# EAGLE board nosilkboth (EAGLE 4.11), part 1 of 3
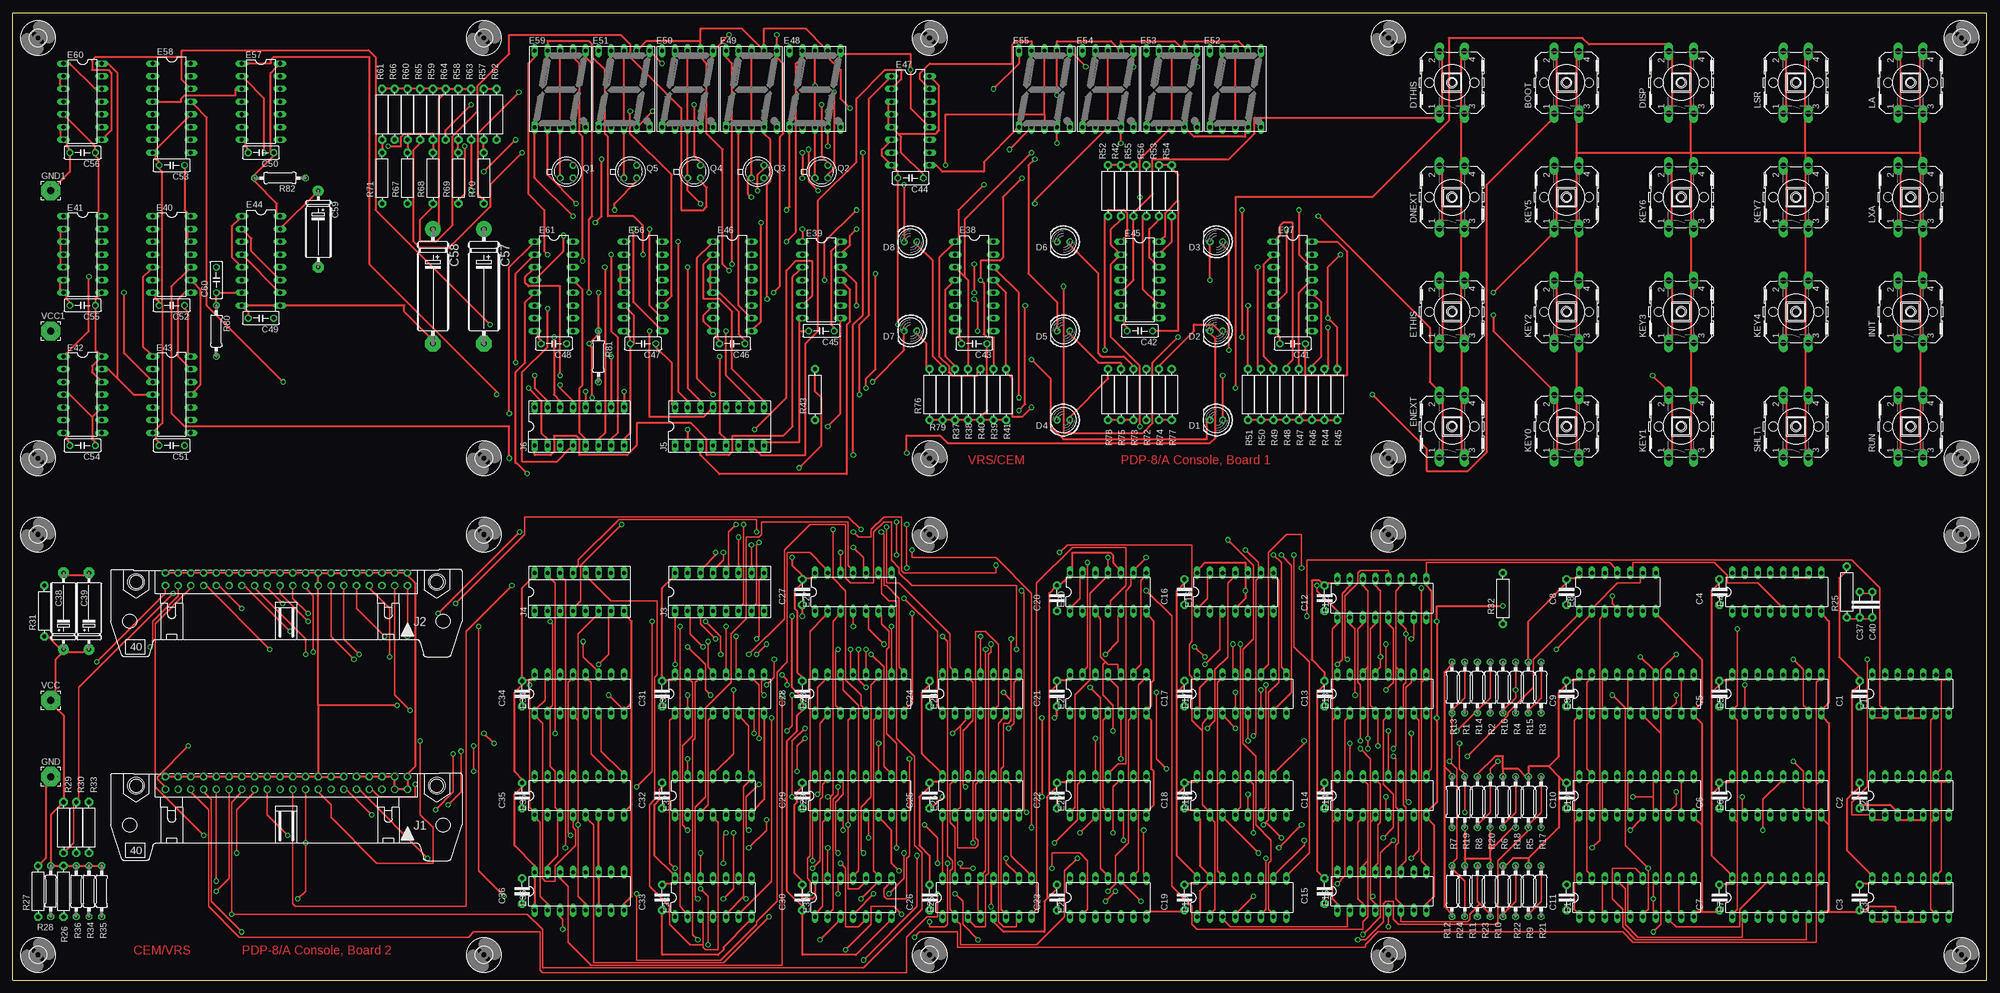
[diagram p0: board, top side]
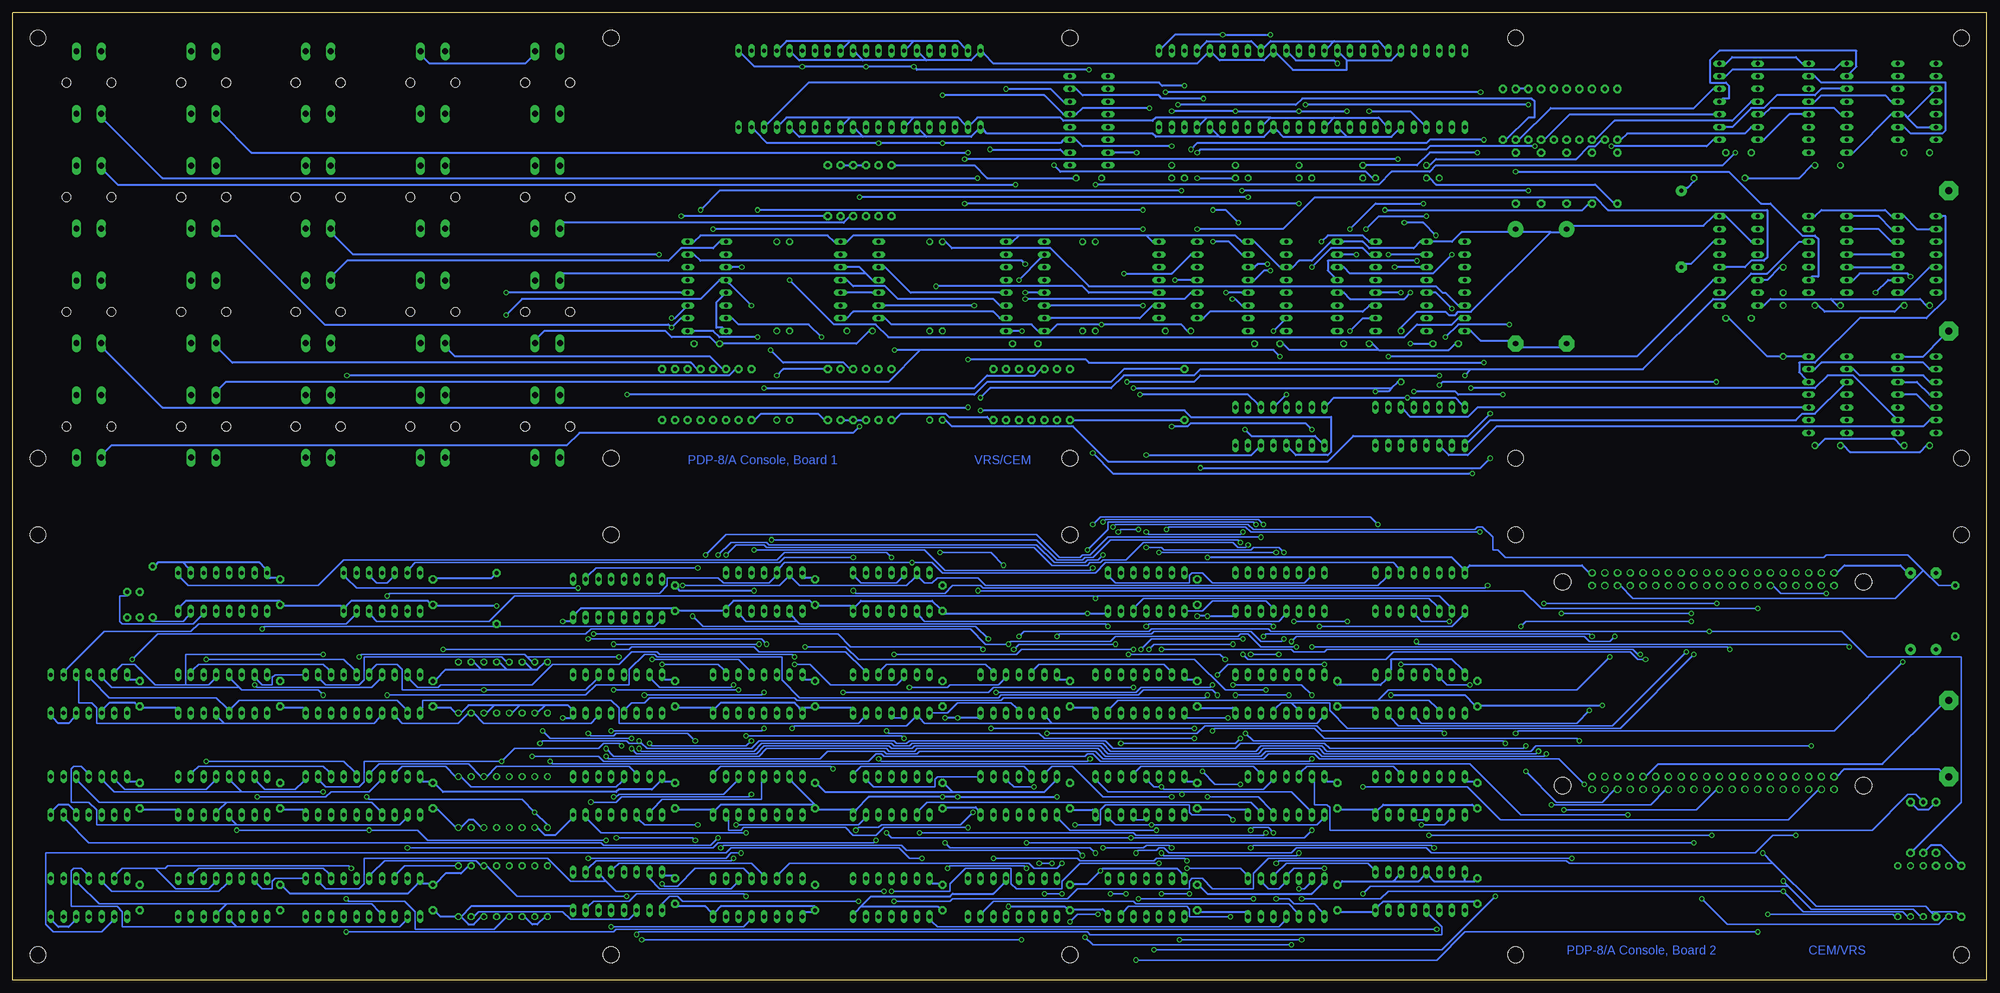
[diagram p1: board, bottom side, seen from below]

Size 393.7 x 193.04 mm. Coordinates in mm from the lower left corner, seen from the top.
Outline: 0,0 0,93.98 0,0
Outline: 0,0 393.7,0 393.7,193.04 0,193.04 0,0
Copper layers (1*16): Top 0.035mm / dielectric 1.5mm / Bottom 0.035mm
Design rules "olimex8mil": minimum track width 10mil, minimum drill 24mil, track to track 8mil, track to pad 8mil, pad to pad 8mil, via to via 8mil, smd to smd 8mil, copper to edge 40mil, drill to drill 10mil, minimum pad ring 10mil, minimum via ring 8mil, stop-mask expansion 0mil, vias tented up to drill 0mil, thermal gap 10mil
Net classes: 1 Supply: width 0.381 mm

## Footprints (pad centres in the part's own frame; a part is rotated, then mirrored left to right if it is on the bottom)
B3F-40XX = drill 1.194 long: 1 -6.248,2.489; 2 6.248,2.489; 3 -6.248,-2.489; 4 6.248,-2.489 | hole 1.803: 0,-4.496; 0,4.496
C-5 = drill 0.813 pad 1.6 octagon: 1 -2.54,0; 2 2.54,0
E15-5 = drill 0.813 pad 2.159 round: + -7.62,0 | drill 0.813 pad 2.159 octagon: - 7.62,0
C050-025X075 = drill 0.813 octagon: 1 -2.54,0; 2 2.54,0
E22-6 = drill 1.016 pad 3.15 round: + -11.43,0 | drill 1.016 pad 3.15 octagon: - 11.43,0
LED5MM = drill 0.813 octagon: A -1.27,0; K 1.27,0
DIL14 = drill 0.813 long: 1 -7.62,-3.81; 2 -5.08,-3.81; 3 -2.54,-3.81; 4 0,-3.81; 5 2.54,-3.81; 6 5.08,-3.81; 7 7.62,-3.81; 8 7.62,3.81; 9 5.08,3.81; 10 2.54,3.81; 11 0,3.81; 12 -2.54,3.81; 13 -5.08,3.81; 14 -7.62,3.81
DIL16 = drill 0.813 long: 1 -8.89,-3.81; 2 -6.35,-3.81; 3 -3.81,-3.81; 4 -1.27,-3.81; 5 1.27,-3.81; 6 3.81,-3.81; 7 6.35,-3.81; 8 8.89,-3.81; 9 8.89,3.81; 10 6.35,3.81; 11 3.81,3.81; 12 1.27,3.81; 13 -1.27,3.81; 14 -3.81,3.81; 15 -6.35,3.81; 16 -8.89,3.81
DIL20 = drill 0.813 long: 1 -11.43,-3.81; 2 -8.89,-3.81; 3 -6.35,-3.81; 4 -3.81,-3.81; 5 -1.27,-3.81; 6 1.27,-3.81; 7 3.81,-3.81; 8 6.35,-3.81; 9 8.89,-3.81; 10 11.43,-3.81; 11 11.43,3.81; 12 8.89,3.81; 13 6.35,3.81; 14 3.81,3.81; 15 1.27,3.81; 16 -1.27,3.81; 17 -3.81,3.81; 18 -6.35,3.81; 19 -8.89,3.81; 20 -11.43,3.81
HDSP-M = drill 0.813 long: 1 -5.08,-7.62; 2 -2.54,-7.62; 3 0,-7.62; 4 2.54,-7.62; 5 5.08,-7.62; 6 5.08,7.62; 7 2.54,7.62; 8 0,7.62; 9 -2.54,7.62; 10 -5.08,7.62
3,81/1,4 = drill 1.397 pad 3.81 octagon: 1 0,0
40H = drill 0.914 round: 1 -24.13,-1.27 | drill 0.914 octagon: 2 -24.13,1.27; 3 -21.59,-1.27; 4 -21.59,1.27; 5 -19.05,-1.27; 6 -19.05,1.27; 7 -16.51,-1.27; 8 -16.51,1.27; 9 -13.97,-1.27; 10 -13.97,1.27; 11 -11.43,-1.27; 12 -11.43,1.27; 13 -8.89,-1.27; 14 -8.89,1.27; 15 -6.35,-1.27; 16 -6.35,1.27; 17 -3.81,-1.27; 18 -3.81,1.27; 19 -1.27,-1.27; 20 -1.27,1.27; 21 1.27,-1.27; 22 1.27,1.27; 23 3.81,-1.27; 24 3.81,1.27; 25 6.35,-1.27; 26 6.35,1.27; 27 8.89,-1.27; 28 8.89,1.27; 29 11.43,-1.27; 30 11.43,1.27; 31 13.97,-1.27; 32 13.97,1.27; 33 16.51,-1.27; 34 16.51,1.27; 35 19.05,-1.27; 36 19.05,1.27; 37 21.59,-1.27; 38 21.59,1.27; 39 24.13,-1.27; 40 24.13,1.27 | hole 3.302: -29.972,0.533; 29.972,0.533
SOCKED-16 = drill 0.813 long: 1 -8.89,-3.81; 2 -6.35,-3.81; 3 -3.81,-3.81; 4 -1.27,-3.81; 5 1.27,-3.81; 6 3.81,-3.81; 7 6.35,-3.81; 8 8.89,-3.81; 9 8.89,3.81; 10 6.35,3.81; 11 3.81,3.81; 12 1.27,3.81; 13 -1.27,3.81; 14 -3.81,3.81; 15 -6.35,3.81; 16 -8.89,3.81
TO18 = drill 0.813 octagon: 1 -1.27,-1.27; 2 1.27,-1.27; 3 1.27,1.27
0207/10 = drill 0.813 octagon: 1 -5.08,0; 2 5.08,0
R-10 = drill 0.813 pad 1.6 octagon: 1 -5.08,0; 2 5.08,0
3,2 = hole 3.2: 0,0

## Placement (x,y rotation side)
BOOT  [B3F-40XX]  309.88,179.07 90 top
C1  [C-5]  368.3,57.15 90 top
C2  [C-5]  368.3,36.83 90 top
C3  [C-5]  368.3,16.51 90 top
C4  [C-5]  340.36,77.47 90 top
C5  [C-5]  340.36,57.15 90 top
C6  [C-5]  340.36,36.83 90 top
C7  [C-5]  340.36,16.51 90 top
C8  [C-5]  309.88,77.47 90 top
C9  [C-5]  309.88,57.15 90 top
C10  [C-5]  309.88,36.83 90 top
C11  [C-5]  309.88,16.51 90 top
C12  [C-5]  261.62,76.2 90 top
C13  [C-5]  261.62,57.15 90 top
C14  [C-5]  261.62,36.83 90 top
C15  [C-5]  261.62,17.78 90 top
C16  [C-5]  233.68,77.47 90 top
C17  [C-5]  233.68,57.15 90 top
C18  [C-5]  233.68,36.83 90 top
C19  [C-5]  233.68,16.51 90 top
C20  [C-5]  208.28,76.2 90 top
C21  [C-5]  208.28,57.15 90 top
C22  [C-5]  208.28,36.83 90 top
C23  [C-5]  208.28,16.51 90 top
C24  [C-5]  182.88,57.15 90 top
C25  [C-5]  182.88,36.83 90 top
C26  [C-5]  182.88,16.51 90 top
C27  [C-5]  157.48,77.47 90 top
C28  [C-5]  157.48,57.15 90 top
C29  [C-5]  157.48,36.83 90 top
C30  [C-5]  157.48,16.51 90 top
C31  [C-5]  129.54,57.15 90 top
C32  [C-5]  129.54,36.83 90 top
C33  [C-5]  129.54,16.51 90 top
C34  [C-5]  101.6,57.15 90 top
C35  [C-5]  101.6,36.83 90 top
C36  [C-5]  101.6,17.78 90 top
C37  10  [C-5]  368.3,74.93 270 top
C38  6.8uf  [E15-5]  10.16,73.66 90 top
C39  6.8uf  [E15-5]  15.24,73.66 90 top
C40  47  [C-5]  370.84,74.93 270 top
C41  0.01  [C050-025X075]  255.27,127 180 top
C42  0.01  [C050-025X075]  224.79,129.54 180 top
C43  0.01  [C050-025X075]  191.77,127 180 top
C44  0.01  [C050-025X075]  179.07,160.02 180 top
C45  0.01  [C050-025X075]  161.29,129.54 180 top
C46  0.01  [C050-025X075]  143.51,127 180 top
C47  0.01  [C050-025X075]  125.73,127 180 top
C48  0.01  [C050-025X075]  107.95,127 180 top
C49  0.01  [C050-025X075]  49.53,132.08 180 top
C50  0.01  [C050-025X075]  49.53,165.1 180 top
C51  0.01  [C050-025X075]  31.75,106.68 180 top
C52  0.01  [C050-025X075]  31.75,134.62 180 top
C53  0.01  [C050-025X075]  31.75,162.56 180 top
C54  0.01  [C050-025X075]  13.97,106.68 180 top
C55  0.01  [C050-025X075]  13.97,134.62 180 top
C56  0.01  [C050-025X075]  13.97,165.1 180 top
C57  6.8uf  [E22-6]  93.98,138.43 270 top
C58  6.8uf  [E22-6]  83.82,138.43 270 top
C59  1.0uf  [E15-5]  60.96,149.86 270 top
C60  82pf  [C050-025X075]  40.64,139.7 90 top
D1  MQ  [LED5MM]  240.03,111.76 180 top
D2  SR  [LED5MM]  240.03,129.54 180 top
D3  MD  [LED5MM]  240.03,147.32 180 top
D4  AC  [LED5MM]  209.55,111.76 180 top
D5  STATUS  [LED5MM]  209.55,129.54 180 top
D6  STATE  [LED5MM]  209.55,147.32 180 top
D7  BUS  [LED5MM]  179.07,129.54 180 top
D8  RUN  [LED5MM]  179.07,147.32 180 top
DISP  [B3F-40XX]  332.74,179.07 90 top
DNEXT  [B3F-40XX]  287.02,156.21 90 top
DTHIS  [B3F-40XX]  287.02,179.07 90 top
E1  74LS95N  [DIL14]  378.46,57.15 0 top
E2  74LS95N  [DIL14]  378.46,36.83 0 top
E3  74LS95N  [DIL14]  378.46,16.51 0 top
E4  74LS123N  [DIL16]  351.79,77.47 0 top
E5  74LS175N  [DIL16]  351.79,57.15 0 top
E6  74LS175N  [DIL16]  351.79,36.83 0 top
E7  74LS175N  [DIL16]  351.79,16.51 0 top
E8  74LS00N  [DIL14]  320.04,77.47 0 top
E9  74S244N  [DIL20]  323.85,57.15 0 top
E10  74S244N  [DIL20]  323.85,36.83 0 top
E11  74S244N  [DIL20]  323.85,16.51 0 top
E12  74LS174N  [DIL16]  273.05,76.2 0 top
E13  74LS174N  [DIL16]  273.05,57.15 0 top
E14  74LS174N  [DIL16]  273.05,36.83 0 top
E15  74LS174N  [DIL16]  273.05,17.78 0 top
E16  74LS74N  [DIL14]  243.84,77.47 0 top
E17  74LS153N  [DIL16]  245.11,57.15 0 top
E18  74LS153N  [DIL16]  245.11,36.83 0 top
E19  74LS153N  [DIL16]  245.11,16.51 0 top
E20  74LS74N  [DIL14]  218.44,77.47 0 top
E21  74LS27N  [DIL14]  218.44,57.15 0 top
E22  74LS02N  [DIL14]  218.44,36.83 0 top
E23  7416N  [DIL14]  218.44,16.51 0 top
E24  74LS04N  [DIL14]  193.04,57.15 0 top
E25  74LS27N  [DIL14]  193.04,36.83 0 top
E26  74LS75N  [DIL16]  194.31,16.51 0 top
E27  7404N  [DIL14]  167.64,77.47 0 top
E28  74LS367N  [DIL16]  168.91,57.15 0 top
E29  74LS138N  [DIL16]  168.91,36.83 0 top
E30  74LS00N  [DIL14]  167.64,16.51 0 top
E31  74LS367N  [DIL16]  140.97,57.15 0 top
E32  74LS08N  [DIL14]  139.7,36.83 0 top
E33  74LS02N  [DIL14]  139.7,16.51 0 top
E34  74LS367N  [DIL16]  113.03,57.15 0 top
E35  74LS138N  [DIL16]  113.03,36.83 0 top
E36  74LS174N  [DIL16]  113.03,17.78 0 top
E37  74LS148N  [DIL16]  255.27,138.43 270 top
E38  74LS148N  [DIL16]  191.77,138.43 270 top
E39  74LS08N  [DIL14]  161.29,139.7 270 top
E40  74LS20N  [DIL14]  31.75,144.78 270 top
E41  74LS95N  [DIL14]  13.97,144.78 270 top
E42  74LS74N  [DIL14]  13.97,116.84 270 top
E43  74LS04N  [DIL14]  31.75,116.84 270 top
E44  74LS123N  [DIL16]  49.53,143.51 270 top
E45  74LS08N  [DIL14]  224.79,139.7 270 top
E46  7446N  [DIL16]  143.51,138.43 270 top
E47  7446N  [DIL16]  179.07,171.45 270 top
E48  HD-H101  [HDSP-M]  160.02,177.8 0 top
E49  HD-H101  [HDSP-M]  147.32,177.8 0 top
E50  HD-H101  [HDSP-M]  134.62,177.8 0 top
E51  HD-H101  [HDSP-M]  121.92,177.8 0 top
E52  HD-H101  [HDSP-M]  243.84,177.8 0 top
E53  HD-H101  [HDSP-M]  231.14,177.8 0 top
E54  HD-H101  [HDSP-M]  218.44,177.8 0 top
E55  HD-H101  [HDSP-M]  205.74,177.8 0 top
E56  7446N  [DIL16]  125.73,138.43 270 top
E57  7416N  [DIL14]  49.53,175.26 270 top
E58  74LS42N  [DIL16]  31.75,173.99 270 top
E59  HD-H101  [HDSP-M]  109.22,177.8 0 top
E60  74LS90N  [DIL14]  13.97,175.26 270 top
E61  74LS145N  [DIL16]  107.95,138.43 270 top
ENEXT  [B3F-40XX]  287.02,110.49 90 top
ETHIS  [B3F-40XX]  287.02,133.35 90 top
GND  [3,81/1,4]  7.62,40.64 0 top
GND1  [3,81/1,4]  7.62,157.48 0 top
INIT  [B3F-40XX]  378.46,133.35 90 top
J1  [40H]  54.61,39.37 180 top
J2  [40H]  54.61,80.01 180 top
J3  [SOCKED-16]  140.97,77.47 0 top
J4  [SOCKED-16]  113.03,77.47 0 top
J5  [SOCKED-16]  140.97,110.49 0 top
J6  [SOCKED-16]  113.03,110.49 0 top
KEY0  [B3F-40XX]  309.88,110.49 90 top
KEY1  [B3F-40XX]  332.74,110.49 90 top
KEY2  [B3F-40XX]  309.88,133.35 90 top
KEY3  [B3F-40XX]  332.74,133.35 90 top
KEY4  [B3F-40XX]  355.6,133.35 90 top
KEY5  [B3F-40XX]  309.88,156.21 90 top
KEY6  [B3F-40XX]  332.74,156.21 90 top
KEY7  [B3F-40XX]  355.6,156.21 90 top
LA  [B3F-40XX]  378.46,179.07 90 top
LSR  [B3F-40XX]  355.6,179.07 90 top
LXA  [B3F-40XX]  378.46,156.21 90 top
Q1  MPSA05  [TO18]  110.49,161.29 0 top
Q2  MPSA05  [TO18]  161.29,161.29 0 top
Q3  MPSA05  [TO18]  148.59,161.29 0 top
Q4  MPSA05  [TO18]  135.89,161.29 0 top
Q5  MPSA05  [TO18]  123.19,161.29 0 top
R1  680  [0207/10]  289.56,58.42 90 top
R2  680  [0207/10]  294.64,58.42 90 top
R3  680  [0207/10]  304.8,58.42 90 top
R4  680  [0207/10]  299.72,58.42 90 top
R5  330  [0207/10]  302.26,35.56 90 top
R6  330  [0207/10]  297.18,35.56 90 top
R7  330  [0207/10]  287.02,35.56 90 top
R8  330  [0207/10]  292.1,35.56 90 top
R9  330  [0207/10]  302.26,17.78 90 top
R10  330  [0207/10]  297.18,17.78 90 top
R11  330  [0207/10]  292.1,17.78 270 top
R12  330  [0207/10]  287.02,17.78 270 top
R13  330  [0207/10]  287.02,58.42 90 top
R14  330  [0207/10]  292.1,58.42 90 top
R15  330  [0207/10]  302.26,58.42 90 top
R16  330  [0207/10]  297.18,58.42 90 top
R17  680  [0207/10]  304.8,35.56 90 top
R18  680  [0207/10]  299.72,35.56 90 top
R19  680  [0207/10]  289.56,35.56 90 top
R20  680  [0207/10]  294.64,35.56 90 top
R21  680  [0207/10]  304.8,17.78 90 top
R22  680  [0207/10]  299.72,17.78 90 top
R23  680  [0207/10]  294.64,17.78 270 top
R24  680  [0207/10]  289.56,17.78 270 top
R25  6K8  [R-10]  365.76,77.47 90 top
R26  180  [R-10]  10.16,17.78 270 top
R27  390  [R-10]  5.08,17.78 90 top
R28  1K  [0207/10]  7.62,17.78 90 top
R29  180  [R-10]  10.16,30.48 270 top
R30  390  [R-10]  12.7,30.48 270 top
R31  1K  [R-10]  6.35,73.66 90 top
R32  1K  [R-10]  297.18,76.2 270 top
R33  1K  [R-10]  15.24,30.48 270 top
R34  1K  [0207/10]  15.24,17.78 270 top
R35  1K  [0207/10]  17.78,17.78 270 top
R36  1K  [0207/10]  12.7,17.78 270 top
R37  1K  [R-10]  187.96,116.84 90 top
R38  1K  [R-10]  190.5,116.84 90 top
R39  1K  [R-10]  195.58,116.84 90 top
R40  1K  [R-10]  193.04,116.84 90 top
R41  1K  [R-10]  198.12,116.84 90 top
R42  1K  [R-10]  220.98,157.48 270 top
R43  1K  [R-10]  160.02,116.84 90 top
R44  1K  [R-10]  261.62,116.84 90 top
R45  1K  [R-10]  264.16,116.84 90 top
R46  1K  [R-10]  259.08,116.84 90 top
R47  1K  [R-10]  256.54,116.84 90 top
R48  1K  [R-10]  254,116.84 90 top
R49  1K  [R-10]  251.46,116.84 90 top
R50  1K  [R-10]  248.92,116.84 90 top
R51  1K  [R-10]  246.38,116.84 90 top
R52  1K  [R-10]  218.44,157.48 270 top
R53  1K  [R-10]  228.6,157.48 270 top
R54  1K  [R-10]  231.14,157.48 270 top
R55  1K  [R-10]  223.52,157.48 270 top
R56  1K  [R-10]  226.06,157.48 270 top
R57  470  [R-10]  93.98,172.72 270 top
R58  470  [R-10]  88.9,172.72 270 top
R59  470  [R-10]  83.82,172.72 270 top
R60  470  [R-10]  78.74,172.72 270 top
R61  470  [R-10]  73.66,172.72 270 top
R62  10  [R-10]  96.52,172.72 270 top
R63  10  [R-10]  91.44,172.72 270 top
R64  10  [R-10]  86.36,172.72 270 top
R65  10  [R-10]  81.28,172.72 270 top
R66  27  [R-10]  76.2,172.72 270 top
R67  27  [R-10]  78.74,160.02 90 top
R68  27  [R-10]  83.82,160.02 90 top
R69  27  [R-10]  88.9,160.02 90 top
R70  27  [R-10]  93.98,160.02 90 top
R71  27  [R-10]  73.66,160.02 90 top
R72  330  [R-10]  226.06,116.84 90 top
R73  330  [R-10]  223.52,116.84 90 top
R74  330  [R-10]  228.6,116.84 90 top
R75  330  [R-10]  220.98,116.84 90 top
R76  330  [R-10]  182.88,116.84 90 top
R77  330  [R-10]  231.14,116.84 90 top
R78  330  [R-10]  218.44,116.84 90 top
R79  330  [R-10]  185.42,116.84 90 top
R80  10K  [0207/10]  40.64,129.54 270 top
R81  10K  [0207/10]  116.84,124.46 270 top
R82  6.8K  [0207/10]  53.34,160.02 0 top
RUN  [B3F-40XX]  378.46,110.49 90 top
SHLT\  [B3F-40XX]  355.6,110.49 90 top
U$1  [3,2]  5.08,5.08 0 top
U$2  [3,2]  5.08,88.9 0 top
U$3  [3,2]  388.62,88.9 0 top
U$4  [3,2]  388.62,5.08 0 top
U$5  [3,2]  93.98,88.9 0 top
U$6  [3,2]  182.88,5.08 0 top
U$7  [3,2]  93.98,5.08 0 top
U$8  [3,2]  274.32,5.08 0 top
U$9  [3,2]  274.32,88.9 0 top
U$10  [3,2]  182.88,88.9 0 top
U$11  [3,2]  5.08,104.14 0 top
U$12  [3,2]  5.08,187.96 0 top
U$13  [3,2]  388.62,187.96 0 top
U$14  [3,2]  388.62,104.14 0 top
U$15  [3,2]  93.98,187.96 0 top
U$16  [3,2]  182.88,104.14 0 top
U$17  [3,2]  93.98,104.14 0 top
U$18  [3,2]  274.32,104.14 0 top
U$19  [3,2]  274.32,187.96 0 top
U$20  [3,2]  182.88,187.96 0 top
VCC  [3,81/1,4]  7.62,55.88 0 top
VCC1  [3,81/1,4]  7.62,129.54 0 top

## Library data of the parts
BOOT DISP DNEXT DTHIS ENEXT ETHIS INIT KEY0 KEY1-KEY7 LA LSR LXA RUN SHLT\ = switch-omron
C1-C37 C40 R25-R27 R29-R33 R37-R79 = discrete
C38 C39 C41-C60 R1-R24 R28 R34-R36 R80-R82 = rcl
D1-D8 = led
E1-E47 E56-E58 E60 E61 = 74xx-us
E48-E55 E59 = display-hp
GND GND1 VCC VCC1 = wirepad
J1 J2 = con-harting-h
J3-J6 = ic-package
Q1-Q5 = transistor-npn
U$1-U$20 = holes

## Nets
A: E46.13 E47.13 E48.7 E49.7 E50.7 E51.7 E52.7 E53.7 E54.7 E55.7
ADDR0: E18.9 J3.9
ADDR1: E17.7 J3.12
ADDR2: E17.9 J3.10
ADDR3: E46.2 J5.9
ADDR4: E46.1 J5.12
ADDR5: E46.7 J5.10
ADRLTH\: E8.11 E12.9 E14.9
B: E46.12 E47.12 E48.6 E49.6 E50.6 E51.6 E52.6 E53.6 E54.6 E55.6
BEMA0: E27.10 J3.14
BEMA1: E27.8 J3.15
BEMA2: E27.12 J3.13
BEMA3: E56.7 J5.13
BEMA4: E56.1 J5.15
BEMA5: E56.2 J5.14
BFSW\: E28.9 J2.24
BKDTACNTL\: E28.3 J2.12
BOOT: BOOT.1 BOOT.2 E40.10 R43.2
BOOTF\: E16.2 E16.6 E28.10
BPOK: E5.1 E6.1 E7.1 E12.1 E13.1 E14.1 E15.1 E16.1 E16.13 E20.1 E20.13 E23.10 J4.10 R32.2
BPWR-OK: E44.2 E44.11 J6.10
BRUN: E24.6 E26.7 E32.4 E33.3 J4.12
BRUN1: E57.1 J6.12
BUS0: E11.3 E11.18 E14.3 E15.3 J1.34 R9.1 R21.2
BUS1: E10.3 E10.18 E14.13 E15.13 J1.36 R5.1 R17.2
BUS2: E9.3 E9.18 E12.6 E13.6 J1.38 R3.2 R15.1
BUS3: E11.5 E11.16 E14.4 E15.4 J1.40 R10.1 R22.2
BUS4: E10.5 E10.16 E14.14 E15.14 J1.20 R6.1 R18.2
BUS5: E9.5 E9.16 E12.11 E13.11 J1.22 R4.2 R16.1
BUS6: E11.7 E11.14 E14.6 E15.6 J1.8 R11.1 R23.2
BUS7: E10.7 E10.14 E12.3 E13.3 J1.6 R7.1 R19.2
BUS8: E9.7 E9.14 E12.13 E13.13 J1.12 R1.2 R12.1 R13.1 R24.2
BUS9: E11.9 E11.12 E14.11 E15.11 J1.10
BUS10: E10.9 E10.12 E12.4 E13.4 J1.16 R8.1 R20.2
BUS11: E9.9 E9.12 E12.14 E13.14 J1.14 R2.2 R14.1
BUSEN\: E34.13 J1.24
C: E46.11 E47.11 E48.4 E49.4 E50.4 E51.4 E52.4 E53.4 E54.4 E55.4
D: E46.10 E47.10 E48.2 E49.2 E50.2 E51.2 E52.2 E53.2 E54.2 E55.2
DEP\: E28.5 J2.20
DISP: DISP.1 DISP.2 E38.4 R37.2
DISP0: E34.2 E35.3 E36.15 J4.5
DISP1: E34.4 E35.2 E36.5 J4.6
DISP2: E34.14 E35.1 E36.2 J4.7
DISP3: E61.13 J6.5
DISP4: E61.14 J6.6
DISP5: E61.15 J6.7
DISPINH: E16.9 E22.12 J4.4
DISPINH1: E61.12 J6.4
DISPLAY0: E19.7 J3.7
DISPLAY1: E19.9 J3.11
DISPLAY2: E18.7 J3.6
DISPLAY3: E47.2 J5.7
DISPLAY4: E47.1 J5.11
DISPLAY5: E47.7 J5.6
DNEXT: DNEXT.1 DNEXT.2 E45.9 R56.2
DSPLTH\: E8.8 E13.9 E15.9
DTHIS: DTHIS.1 DTHIS.2 E45.5 E45.10 R55.2
E: E46.9 E47.9 E48.1 E49.1 E50.1 E51.1 E52.1 E53.1 E54.1 E55.1
E30PIN8: E21.5 E21.11 E30.8
E35-Y4: E32.12 E35.11
EMA0\: E27.11 J1.30 R34.2
EMA1\: E27.9 J1.28 R35.2
EMA2\: E27.13 J1.32 R36.2
EMODE\: E1.6 E2.6 E3.6 E16.8 E22.6
ENEXT: E45.13 ENEXT.1 ENEXT.2 R54.2
ENT0: E3.13 E7.12 E11.6 E36.14
ENT1: E2.13 E6.12 E10.6 E36.4
ENT2: E1.13 E5.12 E9.6 E36.3
ETHIS: E45.4 E45.12 ETHIS.1 ETHIS.2 R53.2
EXTPUL\: J4.9
EXTPUL\1: E39.2 J6.9 R81.2
F: E46.15 E47.15 E48.9 E49.9 E50.9 E51.9 E52.9 E53.9 E54.9 E55.9
FUN\: E24.3 E25.2 E25.11 J4.15
FUN\1: E38.14 E40.12 E40.13 J6.15
G: E46.14 E47.14 E48.10 E49.10 E50.10 E51.10 E52.10 E53.10 E54.10 E55.10
GATEENT\: E9.1 E10.1 E11.1 E21.6 E30.5
GATESR\: E9.19 E10.19 E11.19 E32.11
GND [Supply]: C1.1 C2.1 C3.1 C4.1 C5.1 C6.1 C7.1 C8.1 C9.1 C10.1 C11.1 C12.1 C13.1 C14.1 C15.1 C16.1 C17.1 C18.1 C19.1 C20.1 C21.1 C22.1 C23.1 C24.1 C25.1 C26.1 C27.1 C28.1 C29.1 C30.1 C31.1 C32.1 C33.1 C34.1 C35.1 C36.1 C38.- C39.- E1.3 E1.4 E1.5 E1.7 E2.3 E2.4 E2.5 E2.7 E3.3 E3.4 E3.5 E3.7 E4.8 E5.8 E6.8 E7.8 E8.7 E9.10 E10.10 E11.10 E12.8 E13.8 E14.8 E15.8 E16.7 E17.1 E17.8 E17.15 E18.1 E18.8 E18.15 E19.1 E19.8 E19.15 E20.7 E21.7 E22.7 E23.7 E24.7 E25.7 E26.12 E27.7 E28.8 E29.8 E30.7 E31.8 E32.7 E33.7 E34.8 E35.8 E36.8 GND.1 J1.11 J1.13 J1.15 J1.17 J1.19 J1.21 J1.23 J1.25 J1.27 J1.29 J1.31 J1.33 J1.35 J1.37 J1.39 J2.11 J2.13 J2.15 J2.16 J2.17 J2.19 J2.21 J2.23 J2.25 J2.27 J2.29 J2.31 J2.33 J2.35 J2.37 J2.39 J3.8 J4.8 R1.1 R2.1 R3.1 R4.1 R17.1 R18.1 R19.1 R20.1 R21.1 R22.1 R23.1 R24.1 R27.2 R30.2
GND1: BOOT.3 BOOT.4 C41.2 C42.2 C43.2 C44.2 C45.2 C46.2 C47.2 C48.2 C49.2 C50.2 C51.2 C52.2 C53.2 C54.2 C55.2 C56.2 C57.- C58.- DISP.3 DISP.4 DNEXT.3 DNEXT.4 DTHIS.3 DTHIS.4 E37.5 E37.8 E38.8 E39.7 E40.7 E41.6 E41.7 E42.7 E43.7 E44.8 E44.9 E45.7 E46.6 E46.8 E47.6 E47.8 E56.6 E56.8 E57.7 E58.8 E58.12 E60.2 E60.3 E60.6 E60.7 E60.10 E61.8 ENEXT.3 ENEXT.4 ETHIS.3 ETHIS.4 GND1.1 INIT.3 INIT.4 J5.8 J6.8 KEY0.3 KEY0.4 KEY1.3 KEY1.4 KEY2.3 KEY2.4 KEY3.3 KEY3.4 KEY4.3 KEY4.4 KEY5.3 KEY5.4 KEY6.3 KEY6.4 KEY7.3 KEY7.4 LA.3 LA.4 LSR.3 LSR.4 LXA.3 LXA.4 RUN.3 RUN.4 SHLT\.3 SHLT\.4
IND1\: E28.7 E34.3 J2.8
IND2\: E34.5 J2.4
INIT: E38.13 INIT.1 INIT.2 R41.2
INIT\: E31.9 J2.34
KEY0: E37.4 KEY0.1 KEY0.2 R51.2
KEY1: E37.3 KEY1.1 KEY1.2 R50.2
KEY2: E37.2 KEY2.1 KEY2.2 R49.2
KEY3: E37.1 KEY3.1 KEY3.2 R48.2
KEY4: E37.13 KEY4.1 KEY4.2 R47.2
KEY5: E37.12 KEY5.1 KEY5.2 R46.2
KEY6: E37.11 KEY6.1 KEY6.2 R45.2
KEY7: E37.10 KEY7.1 KEY7.2 R44.2
KEY-F\: E26.4 E26.13 E27.5 J4.3
KEY-F\1: E42.6 J6.3
KEYCNTL\: E31.13 J2.10
KEYSTB: E8.5 E24.1 J4.2
KEYSTB1: E42.9 J6.2
KEYSTB\: E16.11 E21.2 E24.2 E31.1 E33.9 E33.11
KFUN0\: E3.1 E3.2 E26.2 J3.3
KFUN0\1: E39.11 J5.3
KFUN1\: E2.1 E2.2 E26.3 J3.2
KFUN1\1: E39.8 J5.2
KFUN2\: E1.1 E1.2 E26.6 J3.1
KFUN2\1: E39.6 J5.1
LA: E38.2 LA.1 LA.2 R39.2
LAENAB\: E23.2 J2.22
LDSR: E5.9 E6.9 E7.9 E33.13
LSR: E38.3 LSR.1 LSR.2 R38.2
LXA: E38.1 LXA.1 LXA.2 R40.2
MAEN\: E23.8 J2.32
MALC\: E28.11 J2.36
MCLOCK: E42.13 E43.4 E60.14
MCLOCK\: E33.2 J4.1
MCLOCK\1: E39.3 E41.9 E43.3 J6.1
MD\: E34.7 J2.18
MEMSTART\: E31.3 E31.5 J2.26
MH0: E8.13 E20.9 E22.11
MH0\: E8.2 E8.9 E20.8 E20.12 E21.9
MPXA: E17.14 E18.14 E19.14 J4.14
MPXA1: E58.14 E60.8 J6.14
MPXB: E17.2 E18.2 E19.2 J4.13
MPXB1: E58.13 E60.11 J6.13
MSIRDIS\: E31.11 J2.2
N$1: E2.12 E6.13 E10.8
N$2: E1.12 E5.13 E9.8
N$3: E1.11 E5.4 E9.2
N$4: E1.10 E5.5 E9.4
N$5: E2.11 E6.4 E10.2
N$6: E2.10 E6.5 E10.4
N$7: E3.12 E7.13 E11.8
N$8: E3.11 E7.4 E11.2
N$9: E3.10 E7.5 E11.4
N$10: E15.2 E19.3
N$11: E15.5 E19.5
N$12: E15.7 E19.4
N$13: E15.10 E19.6
N$14: E15.12 E19.13
N$15: E15.15 E19.11
N$16: E13.2 E19.12
N$17: E13.5 E19.10
N$18: E13.7 E18.3
N$19: E13.10 E18.5
N$20: E13.12 E18.4
N$21: E13.15 E18.6
N$22: E14.2 E18.13
N$23: E14.5 E18.11
N$24: E14.7 E18.12
N$25: E14.10 E18.10
N$26: E12.15 E17.10
N$27: E12.12 E17.12
N$28: E12.10 E17.11
N$29: E12.7 E17.13
N$30: E14.15 E17.5
N$31: E14.12 E17.3
N$32: E12.2 E17.4
N$33: E12.5 E17.6
N$34: E16.3 E21.12
N$35: E21.1 E24.4
N$36: E22.10 E29.4 E29.5 E31.15
N$37: E22.13 E30.4
N$38: E8.3 E22.5
N$39: E22.3 E33.1
N$40: E22.2 E32.6
N$41: E4.9 E20.11 E22.1
N$42: E22.8 E25.12
N$43: E37.6 E39.13
N$44: E24.8 E32.5
N$45: E37.7 E39.10
N$46: E33.10 E36.9
N$47: E23.11 E24.10
N$48: E29.15 E33.8
N$49: E26.10 E29.1
N$50: E25.13 E26.15 E27.3 E29.2 E30.1
N$51: E25.1 E26.16 E29.3
N$52: E21.3 E21.4 E22.4
N$53: E22.9 E25.8
N$54: E37.9 E39.4
N$55: E28.4 E29.7 E30.10 E32.1
N$56: E28.2 E29.9 E32.2
N$57: E29.10 E31.2
N$58: E29.11 E31.10
N$59: E29.12 E32.9
N$60: E29.13 E30.2 E32.10
N$61: E29.14 E33.12
N$62: E23.1 E33.4
N$63: E7.15 E11.11
N$64: E7.10 E11.13
N$65: E7.7 E11.15
N$66: E7.2 E11.17
N$67: E27.6 E30.13
N$68: E28.14 E30.11
N$69: E31.4 E32.3
N$70: E30.6 E34.1 E34.15 E35.4 E35.5
N$71: E28.6 E30.9 E31.6 E32.8 E33.5
N$72: E34.12 E35.10
N$73: E34.6 E35.9
N$74: E27.4 E31.12
N$75: E4.5 E8.10 E8.12
N$76: E30.3 E31.14
N$77: E27.2 E30.12
N$78: E37.14 E40.9 E43.11
N$79: E6.15 E10.11
N$80: E6.10 E10.13
N$81: E6.7 E10.15
N$82: E6.2 E10.17
N$83: E5.15 E9.11
N$84: E5.10 E9.13
N$85: E5.2 E9.17
N$86: E5.7 E9.15
N$87: E21.8 E23.9
N$88: C37.1 C40.1 E4.6
N$89: C37.2 C40.2 E4.7 R25.1
N$90: E38.6 E39.12
N$91: E38.7 E39.9
N$92: E38.9 E39.5
N$93: E20.4 E26.8
N$94: E25.9 E26.9
N$95: E37.15 E38.5
N$96: E40.1 E41.13
N$97: E40.2 E41.12
N$98: E40.4 E41.11
N$99: E40.6 E42.1
N$100: E40.5 E41.10 E43.1
N$101: E42.3 E43.2
N$102: E41.1 E43.12
N$103: E42.5 E42.11
N$104: E44.1 E44.5
N$105: C60.1 E44.7 R80.1
N$106: C59.+ E44.15 R82.2
N$107: C60.2 E44.6
N$108: C59.- E44.14
N$109: E44.4 E44.10
N$110: E39.1 E44.12
N$111: E40.8 E42.2 E43.13
N$112: E38.12 E45.3
N$113: E38.11 E45.11
N$114: E38.10 E45.8
N$115: E58.15 E60.9
N$116: E57.13 E58.1
N$117: E57.11 E58.2
N$118: E57.9 E58.3
N$119: E57.3 E58.4
N$120: E57.5 E58.5
N$121: E57.12 R57.2 R70.2
N$122: E57.10 R58.2 R69.2
N$123: E57.8 R59.2 R68.2
N$124: Q2.3 R62.2
N$125: Q3.3 R63.2
N$126: Q4.3 R64.2
N$127: Q5.3 R65.2
N$128: Q1.3 R66.2
N$129: Q5.2 R67.1
N$130: Q4.2 R68.1
N$131: Q3.2 R69.1
N$132: Q2.2 R70.1
N$133: E56.13 E59.7
N$134: E56.12 E59.6
N$135: E56.11 E59.4
N$136: E56.10 E59.2
N$137: E56.9 E59.1
N$138: E56.15 E59.9
N$139: E56.14 E59.10
N$140: E50.3 E50.8 E54.3 E54.8 Q4.1
N$141: E49.3 E49.8 E53.3 E53.8 Q3.1
N$142: E48.3 E48.8 E52.3 E52.8 Q2.1
N$143: E57.4 R60.2 R67.2
N$144: Q1.2 R71.1
N$145: E51.3 E51.8 E55.3 E55.8 Q5.1
N$146: E59.3 E59.8 Q1.1
N$147: E57.6 R61.2 R71.2
N$148: E60.1 E60.12
N$149: D3.A R72.2
N$150: D6.A R73.2
N$151: D2.A R74.2
N$152: D5.A R75.2
N$153: D7.A R76.2
N$154: D1.A R77.2
N$155: D4.A R78.2
N$156: D4.K E61.1
N$157: D1.K E61.2
N$158: D7.K E61.3
N$159: D5.K E61.4
N$160: D2.K E61.5
N$161: D6.K E61.6
N$162: D3.K E61.7
N$163: D8.A R79.2
N$164: D8.K E57.2
NUM: E8.4 E16.12 E21.13 J4.11
NUM1: E43.10 J6.11
NUMCLK: E1.8 E1.9 E2.8 E2.9 E3.8 E3.9 E8.6
PANLOCK: E24.12 E25.10 E28.1 E28.15 E33.6
PANLOCK\: E24.13 J2.6 R31.2
POWCK: E24.11 J2.28 R33.2
PULSELOADADD\: E31.7 J2.40
RUN: E45.2 R42.2 RUN.1 RUN.2
RUN\: E24.5 J1.18 R28.1
SHLT\: E27.1 J3.5
SHLT\1: E45.1 J5.5 R52.2 SHLT\.1 SHLT\.2
SINGSTEP\: E28.13 J2.14
SRDATA\: E8.1 E32.13 J2.30 R29.2 R30.1
STATE\: E34.11 J2.38
STHIS\: E20.2 J3.4
STHIS\1: E45.6 J5.4
THIS: E20.5 E28.12
TSI\: E20.3 E21.10 E24.9 J1.26 R26.2 R27.1
VCC [Supply]: C1.2 C2.2 C3.2 C4.2 C5.2 C6.2 C7.2 C8.2 C9.2 C10.2 C11.2 C12.2 C13.2 C14.2 C15.2 C16.2 C17.2 C18.2 C19.2 C20.2 C21.2 C22.2 C23.2 C24.2 C25.2 C26.2 C27.2 C28.2 C29.2 C30.2 C31.2 C32.2 C33.2 C34.2 C35.2 C36.2 C38.+ C39.+ E1.14 E2.14 E3.14 E4.10 E4.11 E4.16 E5.16 E6.16 E7.16 E8.14 E9.20 E10.20 E11.20 E12.16 E13.16 E14.16 E15.16 E16.4 E16.10 E16.14 E17.16 E18.16 E19.16 E20.10 E20.14 E21.14 E22.14 E23.14 E24.14 E25.14 E26.5 E27.14 E28.16 E29.6 E29.16 E30.14 E31.16 E32.14 E33.14 E34.10 E34.16 E35.6 E35.16 E36.1 E36.6 E36.11 E36.13 E36.16 J1.1 J1.2 J1.3 J1.4 J1.5 J1.7 J1.9 J2.1 J2.3 J2.5 J2.7 J2.9 J3.16 J4.16 R5.2 R6.2 R7.2 R8.2 R9.2 R10.2 R11.2 R12.2 R13.2 R14.2 R15.2 R16.2 R25.2 R26.1 R28.2 R29.1 R31.1 R32.1 R33.1 R34.1 R35.1 R36.1 VCC.1
VCC1: C41.1 C42.1 C43.1 C44.1 C45.1 C46.1 C47.1 C48.1 C49.1 C50.1 C51.1 C52.1 C53.1 C54.1 C55.1 C56.1 C57.+ C58.+ E37.16 E38.16 E39.14 E40.14 E41.2 E41.3 E41.4 E41.5 E41.8 E41.14 E42.4 E42.10 E42.12 E42.14 E43.14 E44.3 E44.16 E45.14 E46.3 E46.4 E46.5 E46.16 E47.3 E47.4 E47.5 E47.16 E56.3 E56.4 E56.5 E56.16 E57.14 E58.16 E60.5 E61.16 J5.16 J6.16 R37.1 R38.1 R39.1 R40.1 R41.1 R42.1 R43.1 R44.1 R45.1 R46.1 R47.1 R48.1 R49.1 R50.1 R51.1 R52.1 R53.1 R54.1 R55.1 R56.1 R57.1 R58.1 R59.1 R60.1 R61.1 R62.1 R63.1 R64.1 R65.1 R66.1 R72.1 R73.1 R74.1 R75.1 R76.1 R77.1 R78.1 R79.1 R80.2 R81.1 R82.1 VCC1.1

## Tracks (layer width: path | path; a pad name or v marks a point on that pad's centre or on a via)
A  (via drill 0.61)
  Top 0.381: v208.28,176.53 208.28,184.15 E55.7 208.28,186.69 208.28,187.32 219.07,187.32 220.34,186.06 E54.7 220.98,186.69 220.98,187.32 231.78,187.32 233.04,186.06 E53.7 233.68,186.69 233.68,187.32 244.47,187.32 245.75,186.06 E52.7 | v142.88,141.6 141.6,142.88 141.6,165.74 138.43,168.91 138.43,182.88 137.16,184.15 E50.7 137.16,186.69 137.16,187.32 | 137.16,187.32 126.36,187.32 125.09,186.06 E51.7 | 137.16,187.32 137.16,189.87 145.41,189.87 149.22,186.06 E49.7 149.86,186.69 149.86,189.87 158.12,189.87 161.93,186.06 E48.7 162.56,184.15 165.1,181.61 165.1,175.9 v167,173.99
  Bottom 0.381: v208.28,176.53 187.96,176.53 184.15,172.72 E47.13 181.61,172.72 180.34,173.99 v167,173.99 | v142.88,141.6 144.15,141.6 146.05,139.7 E46.13
ADDR0  (via drill 0.61)
  Top 0.254: v230.12,42.16 228.09,44.2 v228.09,57.4 | v170.18,58.42 168.66,59.94 v168.66,66.04 | v148.34,68.07 148.84,68.58 148.84,79.76 149.35,80.26 J3.9
  Bottom 0.254: v230.12,42.16 230.63,42.67 252.48,42.67 253.49,41.66 E18.9 | v228.09,57.4 199.14,57.4 198.12,58.42 v170.18,58.42 | v168.66,66.04 166.62,68.07 v148.34,68.07
ADDR1  (via drill 0.61)
  Top 0.254: v252.98,84.84 255.02,82.8 255.02,57.4 251.97,54.36 E17.7 | v176.28,84.84 v176.28,91.44 | v144.27,90.93 142.75,89.41 142.75,82.3 J3.12
  Bottom 0.254: v252.98,84.84 250.44,87.38 243.33,87.38 242.82,86.87 189.48,86.87 185.93,83.31 179.83,83.31 179.32,83.82 177.29,83.82 v176.28,84.84 | v176.28,91.44 175.77,91.95 145.29,91.95 v144.27,90.93
ADDR2  (via drill 0.61)
  Top 0.254: v251.46,84.84 252.98,83.31 252.98,62.48 253.49,61.98 E17.9 | v147.32,86.87 147.32,82.3 J3.10
  Bottom 0.254: v251.46,84.84 249.43,86.87 243.84,86.87 243.33,86.36 189.99,86.36 186.44,82.8 179.32,82.8 178.82,83.31 176.78,83.31 176.28,83.82 171.7,83.82 168.15,87.38 150.37,87.38 149.35,86.36 147.83,86.36 v147.32,86.87
ADDR3
  Top 0.381: J5.9 149.86,115.57 143.51,121.92 143.51,133.35 140.97,135.89 137.79,135.89 137.79,142.88 139.06,144.15 E46.2
ADDR4  (via drill 0.61)
  Top 0.381: v139.7,116.84 136.53,120.02 136.53,144.15 139.06,146.69 E46.1
  Bottom 0.381: v139.7,116.84 141.6,114.94 J5.12
ADDR5  (via drill 0.61)
  Top 0.381: v142.24,129.54 142.24,120.65 147.32,115.57 J5.10
  Bottom 0.381: v142.24,129.54 140.34,131.44 E46.7
ADRLTH\
  Top 0.254: E14.9 282.45,41.66 282.96,42.16 282.96,77.72 281.94,78.74 E12.9 281.94,81.28 281.94,83.31 318.52,83.31 319.53,82.3 E8.11
B  (via drill 0.61)
  Top 0.381: v151.76,137.16 153.03,138.43 153.03,168.28 153.67,168.91 153.67,182.88 152.4,184.15 E49.6 152.4,186.69 v152.4,188.59 | v214,182.25 211.46,184.78 E55.6 | v223.52,182.25 223.52,184.15 E54.6 | v236.22,182.25 236.22,184.15 E53.6 | v129.54,182.88 127.64,184.78 E51.6 | E48.6 165.74,184.78 179.07,184.78 v179.07,181.61 179.07,173.99 182.25,170.81 E47.12 | v142.88,188.59 140.34,186.06 E50.6
  Bottom 0.381: v151.76,137.16 148.59,137.16 E46.12 | E52.6 248.28,184.78 245.75,182.25 v236.22,182.25 v223.52,182.25 v214,182.25 213.36,181.61 v179.07,181.61 | v129.54,182.88 130.18,183.51 137.79,183.51 139.06,184.78 E50.6 | v142.88,188.59 v152.4,188.59 161.93,188.59 164.47,186.06 E48.6
BEMA0  (via drill 0.61)
  Top 0.254: v140.21,85.34 140.21,84.84 137.67,82.3 J3.14 | v167.64,86.36 169.67,84.33 169.67,82.3 E27.10
  Bottom 0.254: v140.21,85.34 141.22,86.36 146.3,86.36 146.81,85.85 164.08,85.85 164.59,86.36 v167.64,86.36
BEMA1
  Bottom 0.254: J3.15 135.13,80.26 136.14,79.25 154.43,79.25 156.46,81.28 158.5,81.28 159,80.77 159,79.25 173.74,79.25 174.75,80.26 E27.8
BEMA2  (via drill 0.61)
  Top 0.254: v141.73,85.34 141.73,83.82 140.21,82.3 J3.13 | v165.1,85.34 165.1,82.3 E27.12
  Bottom 0.254: v141.73,85.34 v165.1,85.34
BEMA3  (via drill 0.61)
  Top 0.381: v127,129.54 127,112.39 137.79,112.39 139.06,113.67 J5.13
  Bottom 0.381: v127,129.54 124.46,132.08 123.19,132.08 E56.7
BEMA4  (via drill 0.61)
  Top 0.381: v132.72,147.32 132.72,117.47 134.62,115.57 J5.15
  Bottom 0.381: v132.72,147.32 131.44,148.59 124.46,148.59 123.19,147.32 E56.1
BEMA5  (via drill 0.61)
  Top 0.381: v134.62,142.24 134.62,118.11 137.16,115.57 J5.14
  Bottom 0.381: v134.62,142.24 130.81,146.05 124.46,146.05 123.19,144.78 E56.2
BFSW\  (via drill 0.61)
  Top 0.254: v173.23,89.41 173.74,88.9 173.74,78.74 174.24,78.74 176.78,76.2 176.78,62.48 177.29,61.98 E28.9 | v169.16,89.92 166.62,92.46 102.11,92.46 102.11,88.9 v88.39,75.18 | v53.85,75.18 50.8,78.23 J2.24
  Bottom 0.254: v173.23,89.41 172.72,89.92 v169.16,89.92 | v88.39,75.18 v53.85,75.18
BKDTACNTL\  (via drill 0.61)
  Top 0.254: v164.59,66.04 164.08,65.53 164.08,54.86 164.59,54.36 E28.3 | v69.09,65.02 66.04,68.07 66.04,78.23 J2.12
  Bottom 0.254: v164.59,66.04 138.68,66.04 138.18,65.53 132.08,65.53 131.57,66.04 70.61,66.04 69.6,65.02 v69.09,65.02
BOOT  (via drill 0.61)
  Top 0.381: BOOT.2 307.98,184.15 307.98,173.99 BOOT.1 306.7,171.45 294,158.75 294,105.41 290.19,101.6 281.94,101.6 281.94,106.05 v271.14,116.84 | v99.06,104.14 99.06,110.49 34.29,110.49 31.75,113.03 31.75,138.43 34.92,141.6 E40.10 | v156.84,102.23 161.29,106.68 161.29,116.2 160.02,117.47 160.02,121.28 R43.2
  Bottom 0.381: v99.06,104.14 100.97,102.23 v156.84,102.23 | v271.14,116.84 201.93,116.84 199.39,119.38 174.62,119.38 172.09,121.92 160.66,121.92 R43.2
BOOTF\  (via drill 0.61)
  Top 0.254: v175.26,70.61 175.26,61.98 E28.10
  Bottom 0.254: v175.26,70.61 175.77,71.12 236.73,71.12 237.24,71.63 | 237.24,71.63 238.25,72.64 E16.2 | 237.24,71.63 247.4,71.63 248.41,72.64 E16.6
BPOK  (via drill 0.61)
  Top 0.254: E16.1 236.73,74.68 238.25,76.2 238.25,80.26 E16.13 | E20.1 211.33,74.68 212.85,76.2 212.85,80.26 E20.13 | 343.92,31.5 343.92,14.22 343.41,13.72 E7.1 | 343.92,31.5 343.41,32 E6.1 | 343.92,31.5 343.92,51.82 343.41,52.32 E5.1 343.41,54.36 343.92,54.86 v343.92,70.1 | 263.14,31.5 263.14,16.26 264.16,15.24 E15.1 | 263.14,31.5 263.65,32 E14.1 | v225.04,15.75 221.49,19.3 E23.10 | 263.14,51.82 263.65,52.32 E13.1 | 263.14,31.5 263.14,51.82 | 263.14,51.82 263.14,70.1 264.16,71.12 E12.1 264.16,73.66 260.1,77.72 v260.1,78.74
  Bottom 0.254: J4.10 119.89,80.26 121.41,78.74 199.64,78.74 201.17,80.26 209.3,80.26 210.31,79.25 211.84,79.25 212.85,80.26 E20.13 213.87,80.26 215.39,78.74 236.73,78.74 238.25,80.26 E16.13 239.27,80.26 240.79,78.74 v260.1,78.74 | v225.04,15.75 260.1,15.75 261.11,16.76 262.64,16.76 264.16,15.24 E15.1 | E12.1 264.67,71.63 265.68,70.61 296.67,70.61 R32.2 297.69,70.61 343.41,70.61 v343.92,70.1
BPWR-OK  (via drill 0.61)
  Top 0.381: E44.11 52.7,140.34 47.62,145.41 47.62,147.96 46.35,149.22 E44.2 | v119.38,124.46 119.38,115.57 J6.10
  Bottom 0.381: v119.38,124.46 69.85,124.46 54.61,139.7 E44.11
BRUN
  Top 0.254: E24.6 197.61,52.32 196.6,51.31 196.6,11.68 197.61,10.67 200.15,10.67 200.15,11.68 E26.7 | 137.67,7.11 137.67,6.6 138.18,6.1 140.72,6.1 140.72,31.5 140.21,32 E32.4 | 137.67,7.11 137.67,11.68 E33.3 | 137.67,7.11 135.13,7.11 131.06,11.18 131.06,14.73 127,18.8 127,35.05 128.02,36.07 128.02,60.45 128.52,60.96 128.52,75.69 119.38,75.69 114.81,80.26 J4.12
  Bottom 0.254: E26.7 200.15,13.72 198.12,15.75 170.18,15.75 169.67,15.24 139.19,15.24 137.67,13.72 E33.3
BRUN1  (via drill 0.61)
  Top 0.381: v96.52,116.84 96.52,117.47 71.12,142.88 71.12,184.15 52.07,184.15 51.44,183.51 51.44,182.88 46.99,182.88 E57.1 | v114.3,117.47 114.3,115.57 J6.12
  Bottom 0.381: v96.52,116.84 105.41,116.84 106.05,117.47 v114.3,117.47
BUS0  (via drill 0.61)
  Top 0.254: E11.3 316.99,13.72 316.99,19.3 E11.18 | R9.1 302.26,13.21 304.8,15.75 304.8,22.35 R21.2 | E15.3 269.24,15.24 268.22,16.26 268.22,31.5 268.73,32 E14.3 | v45.72,9.65 39.62,15.75 39.62,36.07 38.1,37.59 J1.34 | v169.67,4.06 180.34,14.73 v180.34,24.89 | v252.48,26.42 v257.05,30.99
  Bottom 0.254: E11.18 316.99,21.34 315.47,22.86 305.31,22.86 R21.2 | v45.72,9.65 104.14,9.65 109.73,4.06 v169.67,4.06 | v180.34,24.89 181.36,25.91 215.39,25.91 216.41,26.92 251.97,26.92 v252.48,26.42 | v257.05,30.99 267.72,30.99 268.73,32 E14.3 | R9.1 301.75,12.7 300.74,13.72 283.97,13.72 282.45,12.19 270.76,12.19 269.75,13.21 E15.3
BUS1  (via drill 0.61)
  Top 0.254: E15.13 271.78,22.86 272.29,23.37 272.29,30.99 272.8,31.5 272.8,39.12 272.29,39.62 E14.13 | E10.3 316.99,34.04 316.99,39.62 E10.18 | R17.2 304.8,40.13 304.8,33.53 302.26,30.99 R5.1 302.26,29.97 296.16,23.88 296.16,11.18 276.35,11.18 275.34,12.19 275.34,15.75 273.81,15.75 273.3,15.24 273.3,11.68 269.75,8.13 v268.22,8.13 | v184.4,17.27 184.4,12.7 182.37,12.7 178.31,8.64 178.31,1.52 105.66,1.52 105.16,2.03 105.16,9.65 91.95,9.65 90.93,8.64 45.21,8.64 39.12,14.73 39.12,34.04 35.56,37.59 J1.36 | v187.96,17.27 189.48,15.75 189.48,11.18 v192.53,8.13
  Bottom 0.254: v187.96,17.27 v184.4,17.27 | v268.22,8.13 v192.53,8.13 | E10.18 316.99,41.66 315.98,42.67 307.34,42.67 305.31,40.64 R17.2 304.29,40.64 302.26,38.61 273.3,38.61 272.29,39.62 E14.13
BUS2  (via drill 0.61)
  Top 0.254: E9.3 316.99,54.36 316.99,59.94 E9.18 | R15.1 302.26,53.85 304.8,56.39 304.8,62.99 R3.2 | E13.6 277.37,54.36 277.37,58.93 277.88,59.44 v277.88,69.09 277.88,70.1 276.86,71.12 E12.6 | v124.46,38.61 127.51,41.66 v127.51,71.63 | v138.18,71.63 141.22,68.58 v141.22,65.02 | v146.81,65.02 153.92,72.14 153.92,85.85 159,90.93 166.12,90.93 166.12,80.26 167.13,79.25 171.7,79.25 171.7,89.41 173.74,91.44 175.26,91.44 175.26,83.82 176.78,82.3 176.78,81.28 179.32,78.74 200.15,78.74 v200.15,66.04
  Bottom 0.254: E9.3 316.99,52.32 315.98,51.31 304.8,51.31 302.77,53.34 R15.1 301.75,53.34 299.72,51.31 278.38,51.31 277.37,52.32 E13.6 | v124.46,38.61 103.63,38.61 97.03,32 39.62,32 33.53,38.1 J1.38 | v138.18,71.63 v127.51,71.63 | v146.81,65.02 v141.22,65.02 | v200.15,66.04 200.66,66.55 226.57,66.55 229.11,69.09 v277.88,69.09
BUS3  (via drill 0.61)
  Top 0.254: E11.5 322.07,13.72 322.07,19.3 E11.16 | R10.1 297.18,13.21 299.72,15.75 299.72,22.35 R22.2 | 270.76,31.5 270.76,16.76 | 270.76,16.76 270.76,16.26 271.78,15.24 E15.4 | 270.76,31.5 271.27,32 E14.4 | v35.05,46.74 28.96,40.64 28.96,40.13 30.48,38.61 J1.40 | v268.73,46.23 270.76,44.2 270.76,31.5 | 270.76,16.76 v271.27,16.76
  Bottom 0.254: E11.16 322.07,21.34 319.53,23.88 301.24,23.88 300.23,22.86 R22.2 299.21,22.86 293.12,16.76 v271.27,16.76 | v35.05,46.74 89.92,46.74 90.93,45.72 131.57,45.72 132.59,46.74 144.78,46.74 145.8,45.72 174.75,45.72 176.28,47.24 214.38,47.24 214.88,46.74 217.93,46.74 218.44,47.24 244.35,47.24 245.87,45.72 268.22,45.72 v268.73,46.23
BUS4  (via drill 0.61)
  Top 0.254: E10.5 322.07,34.04 322.07,39.62 E10.16 | R6.1 297.18,30.99 299.72,33.53 299.72,40.13 R18.2 | 270.26,23.88 269.24,22.86 E15.14 | 270.26,23.88 270.26,39.12 269.75,39.62 E14.14 | v99.57,78.74 90.42,69.6 90.42,14.73 56.39,14.73 55.88,15.24 55.88,37.59 J1.20 | v226.06,77.72 231.14,72.64 231.14,18.8 235.2,14.73 235.2,11.18 236.22,10.16 269.24,10.16 269.24,11.68 270.26,12.7 270.26,23.88
  Bottom 0.254: E10.16 322.07,41.66 320.55,43.18 302.77,43.18 300.23,40.64 R18.2 299.21,40.64 297.18,42.67 270.76,42.67 269.75,41.66 E14.14 | v99.57,78.74 100.08,78.23 200.15,78.23 200.66,78.74 206.25,78.74 207.77,77.22 225.55,77.22 v226.06,77.72
BUS5  (via drill 0.61)
  Top 0.254: R16.1 297.18,53.85 299.72,56.39 v299.72,57.91 299.72,62.99 R4.2 | E9.5 322.07,54.36 322.07,59.94 E9.16 | 275.84,62.48 276.35,61.98 E13.11 | 275.84,62.48 275.84,77.72 276.86,78.74 E12.11 | v84.33,34.04 87.88,37.59 v87.88,45.21 | v275.34,46.23 275.84,46.74 275.84,62.48
  Bottom 0.254: v84.33,34.04 57.91,34.04 53.85,38.1 J1.22 | v87.88,45.21 88.39,44.7 132.59,44.7 133.6,45.72 143.76,45.72 144.78,44.7 175.77,44.7 177.29,46.23 213.36,46.23 213.87,45.72 218.95,45.72 219.46,46.23 243.33,46.23 244.86,44.7 273.81,44.7 v275.34,46.23 | E9.16 322.07,61.98 321.06,62.99 316.99,62.99 315.98,61.98 315.98,57.91 v299.72,57.91 279.4,57.91 277.37,59.94 E13.11
BUS6  (via drill 0.61)
  Top 0.254: E11.7 327.15,13.72 v327.15,16.26 327.15,19.3 E11.14 | 292.61,15.24 292.1,15.75 292.1,22.35 R11.1 | 292.61,15.24 294.64,13.21 R23.2 | v80.26,39.12 80.26,36.58 73.15,36.58 71.63,38.1 J1.8 | v275.34,44.7 275.84,44.2 275.84,34.54 276.35,34.04 E14.6 276.35,32 276.35,27.43 275.84,26.92 275.84,16.26 276.86,15.24 E15.6 276.86,12.7 276.86,11.68 290.07,11.68 290.58,12.19 290.58,13.21 292.61,15.24
  Bottom 0.254: v327.15,16.26 326.64,15.75 315.47,15.75 313.44,13.72 313.44,10.16 297.69,10.16 295.15,12.7 R23.2 | v80.26,39.12 85.34,44.2 133.1,44.2 134.11,45.21 143.26,45.21 144.27,44.2 176.28,44.2 177.8,45.72 212.85,45.72 213.36,45.21 219.46,45.21 219.96,45.72 231.14,45.72 232.66,44.2 274.83,44.2 v275.34,44.7
BUS7  (via drill 0.61)
  Top 0.254: 327.15,36.58 327.15,39.62 E10.14 | 327.15,36.58 327.15,34.04 E10.7 | v289.56,33.53 289.56,40.13 R19.2 289.56,41.15 288.54,42.16 v288.54,47.24 | v323.09,36.58 327.15,36.58 | E12.3 269.24,71.12 268.22,70.1 268.22,59.44 268.73,58.93 268.73,54.36 E13.3 268.73,52.32 v268.73,47.75 | v91.95,46.74 v91.95,41.66
  Bottom 0.254: R7.1 287.02,30.99 v289.56,33.53 292.1,36.07 322.58,36.07 v323.09,36.58 | v91.95,41.66 85.85,35.56 76.71,35.56 74.17,38.1 J1.6 | v91.95,46.74 92.46,46.23 131.06,46.23 132.08,47.24 148.84,47.24 149.86,46.23 174.24,46.23 175.77,47.75 214.88,47.75 215.39,47.24 217.42,47.24 217.93,47.75 244.86,47.75 246.38,46.23 267.21,46.23 268.22,47.24 | 268.22,47.24 v268.73,47.75 | v288.54,47.24 288.04,47.75 271.27,47.75 270.76,47.24 268.22,47.24
BUS8  (via drill 0.61)
  Top 0.254: E13.13 272.29,61.98 272.8,62.48 v272.8,64.52 272.8,77.72 271.78,78.74 E12.13 | R24.2 289.56,13.21 289.56,19.81 287.02,22.35 R12.1 287.02,23.37 288.04,24.38 288.04,42.16 v286.51,43.69 287.02,44.2 287.02,52.83 R13.1 287.02,53.85 289.56,56.39 289.56,62.99 R1.2 | E9.7 327.15,54.36 327.15,59.94 E9.14 327.15,61.98 v324.61,64.52 | v71.63,33.02 66.55,38.1 J1.12
  Bottom 0.254: v71.63,33.02 92.96,33.02 103.12,43.18 286,43.18 v286.51,43.69 | v324.61,64.52 324.1,65.02 291.59,65.02 291.08,64.52 | 291.08,64.52 290.07,63.5 R1.2 | 291.08,64.52 v272.8,64.52
BUS9  (via drill 0.61)
  Top 0.254: E11.9 332.23,13.72 332.23,19.3 E11.12 | E15.11 276.86,22.86 277.88,23.88 277.88,34.54 277.37,35.05 277.37,39.62 E14.11 | v82.8,24.38 69.09,38.1 J1.10 | v219.96,17.78 v217.93,15.75
  Bottom 0.254: v82.8,24.38 143.26,24.38 146.3,21.34 146.3,18.29 154.43,18.29 156.46,20.32 158.5,20.32 159,19.81 159,18.29 181.36,18.29 183.39,16.26 206.25,16.26 206.76,15.75 v217.93,15.75 | v219.96,17.78 273.3,17.78 275.34,19.81 | 275.34,19.81 276.35,20.83 E15.11 | 275.34,19.81 282.45,19.81 287.02,24.38 323.6,24.38 323.6,19.3 324.61,18.29 331.22,18.29 332.23,19.3 E11.12
BUS10  (via drill 0.61)
  Top 0.254: E10.9 332.74,34.04 332.74,39.62 E10.12 | R8.1 292.1,30.99 294.64,33.53 294.64,40.13 R20.2 294.64,41.15 294.64,42.16 v296.16,43.69 | E12.4 271.78,71.12 270.76,70.1 270.76,54.86 271.27,54.36 E13.4 272.29,52.32 v272.29,46.74 | v81.28,47.75 81.28,33.02 83.82,30.48 83.82,23.37 72.64,23.37 63.5,32.51 63.5,35.05 60.96,37.59 J1.16 | v154.43,49.78 155.45,50.8 v155.45,56.9
  Bottom 0.254: E10.12 332.23,39.62 331.22,38.61 324.61,38.61 323.6,39.62 323.6,43.69 v296.16,43.69 293.62,46.23 276.86,46.23 275.84,47.24 272.8,47.24 v272.29,46.74 | v81.28,47.75 81.79,48.26 132.08,48.26 134.11,50.29 153.92,50.29 v154.43,49.78 | v155.45,56.9 155.96,56.39 196.09,56.39 196.6,55.88 237.24,55.88 237.74,56.39 266.7,56.39 267.72,55.37 270.26,55.37 271.27,54.36 E13.4
BUS11  (via drill 0.61)
  Top 0.254: E9.9 332.74,54.36 332.74,59.94 E9.12 | R2.2 294.64,62.99 294.64,56.39 292.1,53.85 R14.1 291.59,53.34 v288.04,49.78 | 270.26,62.48 269.75,61.98 E13.14 | 270.26,62.48 270.26,77.72 269.24,78.74 E12.14 | v86.87,35.05 89.41,37.59 v89.41,45.72 | 270.26,62.48 v270.26,48.26 v270.26,46.23
  Bottom 0.254: E9.12 332.23,59.94 331.22,58.93 324.61,58.93 323.6,59.94 323.6,64.52 296.16,64.52 295.15,63.5 R2.2 | v86.87,35.05 67.06,35.05 64.01,38.1 J1.14 | v89.41,45.72 89.92,45.21 132.08,45.21 133.1,46.23 144.27,46.23 145.29,45.21 175.26,45.21 176.78,46.74 213.87,46.74 214.38,46.23 218.44,46.23 218.95,46.74 243.84,46.74 245.36,45.21 269.24,45.21 v270.26,46.23 | v288.04,49.78 286.51,48.26 v270.26,48.26
BUSEN\  (via drill 0.61)
  Top 0.254: v111.25,28.96 110.74,29.46 110.74,59.44 111.25,59.94 E34.13 | v54.86,28.96 50.8,33.02 50.8,37.59 J1.24
  Bottom 0.254: v54.86,28.96 v111.25,28.96
C  (via drill 0.61)
  Top 0.381: v208.28,167 208.28,168.91 E55.4 | v220.98,167 220.98,168.91 E54.4 | E53.4 234.31,169.54 235.59,168.28 245.75,168.28 245.75,169.54 E52.4 | v150.5,135.89 150.5,158.75 151.13,159.38 151.13,167.64 149.86,168.91 E49.4 149.86,171.45 v149.86,173.35 | v127.64,173.35 125.09,170.81 E51.4 | v137.16,173.35 137.16,171.45 E50.4 | v162.56,173.35 162.56,171.45 E48.4 162.56,168.91 v162.56,166.37
  Bottom 0.381: E52.4 245.75,169.54 243.21,167 v220.98,167 v208.28,167 184.78,167 184.15,167.64 E47.11 181.61,167.64 180.34,166.37 v162.56,166.37 | v150.5,135.89 149.86,135.89 148.59,134.62 E46.11 | v127.64,173.35 v137.16,173.35 v149.86,173.35 v162.56,173.35
D  (via drill 0.61)
  Top 0.381: v198.75,165.74 202.56,169.54 E55.2 | E46.10 146.69,132.72 144.78,134.62 144.78,168.91 E49.2
  Bottom 0.381: v198.75,165.74 184.78,165.74 184.15,165.1 E47.10 | 214,172.09 215.26,170.81 E54.2 | 214,172.09 205.1,172.09 203.84,170.81 E55.2 202.56,170.81 201.29,172.09 184.78,172.09 184.15,171.45 166.37,171.45 165.74,172.09 155.57,172.09 | 226.69,172.09 227.97,170.81 E53.2 | 214,172.09 226.69,172.09 | 226.69,172.09 239.4,172.09 240.66,170.81 E52.2 | 130.18,172.09 121.28,172.09 120.02,170.81 E51.2 | 130.18,172.09 131.44,170.81 E50.2 | 142.88,172.09 144.15,170.81 E49.2 | 142.88,172.09 130.18,172.09 | 155.57,172.09 156.84,170.81 E48.2 | 142.88,172.09 155.57,172.09
DEP\  (via drill 0.61)
  Top 0.254: v163.58,89.92 163.58,80.26 166.12,77.72 166.12,59.94 169.16,56.9 169.16,54.86 169.67,54.36 E28.5 | v84.84,73.15 v101.09,89.41 | v58.93,73.15 55.88,76.2 55.88,78.23 J2.20
  Bottom 0.254: v163.58,89.92 163.07,90.42 147.83,90.42 146.81,89.41 v101.09,89.41 | v58.93,73.15 v84.84,73.15
DISP  (via drill 0.61)
  Top 0.381: DISP.1 330.83,173.99 330.83,184.15 DISP.2 329.56,186.69 314.32,186.69 313.06,187.96 286.38,187.96 286.38,171.45 271.14,156.21 243.84,156.21 v243.84,118.11 | E38.4 187.32,139.06 186.06,137.79 186.06,124.46 187.96,122.56 R37.2
  Bottom 0.381: v243.84,118.11 201.93,118.11 199.39,120.65 189.87,120.65 188.59,121.92 R37.2
DISP0  (via drill 0.61)
  Top 0.254: E36.15 106.68,22.86 108.71,24.89 108.71,32 E35.3 108.71,34.04 108.2,34.54 108.2,41.66 107.19,42.67 107.19,52.32 E34.2 107.19,54.36 107.7,54.86 107.7,71.12 v107.19,71.63
  Bottom 0.254: v107.19,71.63 112.78,71.63 113.79,72.64 J4.5
DISP1  (via drill 0.61)
  Top 0.254: 112.78,51.82 v112.78,30.99 112.78,16.76 114.3,15.24 E36.5 | 112.78,51.82 112.27,52.32 E34.4 | 112.78,51.82 112.78,69.09 116.33,72.64 J4.6
  Bottom 0.254: v112.78,30.99 108.2,30.99 107.19,32 E35.2
DISP2  (via drill 0.61)
  Top 0.254: E36.2 106.68,15.24 105.16,16.76 105.16,31.5 104.65,32 E35.1 103.63,34.04 103.12,34.54 v103.12,58.93 | v116.84,62.99 118.87,65.02 118.87,72.64 J4.7
  Bottom 0.254: v116.84,62.99 110.74,62.99 109.73,61.98 E34.14 108.71,59.94 107.7,58.93 v103.12,58.93
DISP3
  Top 0.381: E61.13 112.39,139.06 113.67,137.79 113.67,118.75 113.03,118.11 113.03,109.22 114.3,107.95 J6.5
DISP4  (via drill 0.61)
  Top 0.381: v118.11,142.24 118.11,109.22 116.84,107.95 J6.6
  Bottom 0.381: v118.11,142.24 113.03,142.24 E61.14
DISP5  (via drill 0.61)
  Top 0.381: v119.38,144.78 119.38,129.54 120.65,128.27 120.65,109.22 119.38,107.95 J6.7
  Bottom 0.381: v119.38,144.78 113.03,144.78 E61.15
DISPINH  (via drill 0.61)
  Top 0.254: v215.9,48.26 215.9,41.66 E22.12 | v247.4,48.77 247.9,49.28 247.9,79.76 248.41,80.26 E16.9 248.41,82.3 248.41,83.31 v245.87,85.85 | v121.41,90.93 113.28,82.8 113.28,75.69 112.27,74.68 J4.4 | v178.31,82.3 v178.31,90.93
  Bottom 0.254: v215.9,48.26 216.41,48.77 v247.4,48.77 | v121.41,90.93 122.94,92.46 176.78,92.46 v178.31,90.93 | v178.31,82.3 178.82,81.79 207.77,81.79 211.84,85.85 v245.87,85.85
DISPINH1  (via drill 0.61)
  Top 0.381: v106.68,133.99 106.68,126.36 101.6,121.28 101.6,103.5 108.58,103.5 111.12,106.05 J6.4
  Bottom 0.381: v106.68,133.99 109.86,137.16 110.49,137.16 E61.12
DISPLAY0  (via drill 0.61)
  Top 0.254: v242.32,87.88 247.4,82.8 247.4,68.07 245.36,66.04 245.36,47.24 247.9,44.7 247.9,30.99 250.95,27.94 250.95,23.88 250.44,23.37 250.44,14.22 250.95,13.72 E19.7 | v148.84,87.38 148.34,86.87 148.34,75.18 147.83,74.68 J3.7
  Bottom 0.254: v242.32,87.88 189.48,87.88 185.42,83.82 180.34,83.82 179.83,84.33 178.31,84.33 174.75,87.88 149.35,87.88 v148.84,87.38
DISPLAY1  (via drill 0.61)
  Top 0.254: v255.52,84.84 255.52,66.55 258.57,63.5 258.57,25.4 254.51,21.34 E19.9 | v144.78,88.39 144.78,82.3 J3.11
  Bottom 0.254: v255.52,84.84 251.46,88.9 189.48,88.9 184.91,84.33 180.85,84.33 180.34,84.84 178.82,84.84 175.26,88.39 v144.78,88.39
DISPLAY2  (via drill 0.61)
  Top 0.254: v203.2,30.48 203.2,77.22 196.09,84.33 179.32,84.33 v179.32,85.85 | v145.8,90.93 145.8,75.18 145.29,74.68 J3.6
  Bottom 0.254: v203.2,30.48 219.96,30.48 221.49,28.96 226.06,28.96 227.58,30.48 247.9,30.48 248.41,29.97 250.95,29.97 250.95,32 E18.7 | v179.32,85.85 175.26,89.92 175.26,91.44 146.3,91.44 v145.8,90.93
DISPLAY3
  Top 0.381: J5.7 147.96,106.05 149.22,104.78 158.12,104.78 158.12,127 160.66,129.54 160.66,155.57 168.28,163.19 168.28,175.9 173.99,181.61 177.16,181.61 177.16,179.71 175.9,178.44 E47.2
DISPLAY4  (via drill 0.61)
  Top 0.381: v168.91,116.84 168.91,130.81 170.81,132.72 170.81,175.9 174.62,179.71 E47.1
  Bottom 0.381: v168.91,116.84 147.32,116.84 145.41,114.94 J5.11
DISPLAY5  (via drill 0.61)
  Top 0.381: v167.64,104.78 167.64,130.81 169.54,132.72 v169.54,165.1
  Bottom 0.381: v167.64,104.78 146.69,104.78 145.41,106.05 J5.6 | v169.54,165.1 173.99,165.1 E47.7
DNEXT
  Top 0.381: DNEXT.1 285.12,151.13 285.12,161.29 DNEXT.2 | E45.9 227.97,135.25 225.43,137.79 225.43,152.4 R56.2
  Bottom 0.381: DNEXT.1 283.85,151.13 227.97,151.13 226.69,152.4 R56.2
DSPLTH\  (via drill 0.61)
  Top 0.254: 280.92,59.44 280.92,23.88 281.94,22.86 E15.9 | 280.92,59.44 281.43,59.94 E13.9 | 280.92,59.44 v280.92,78.23
  Bottom 0.254: v280.92,78.23 325.12,78.23 327.15,80.26 E8.8
DTHIS
  Top 0.381: DTHIS.2 285.12,184.15 285.12,173.99 DTHIS.1 283.85,172.09 247.65,172.09 247.65,168.91 242.57,163.83 227.33,163.83 227.33,156.84 223.52,153.03 R55.2 223.52,151.76 223.52,139.7 221.62,137.79 E45.5
  Bottom 0.381: E45.5 222.25,137.16 227.33,137.16 E45.10
E  (via drill 0.61)
  Top 0.381: E47.9 184.15,162.56 185.42,161.29 193.68,161.29 193.68,163.19 200.03,169.54 E55.1 | v149.22,151.13 149.22,131.44 147.96,130.18 E46.9 | v154.31,153.67 154.94,154.31 154.94,168.91 E48.1
  Bottom 0.381: 211.46,168.28 212.72,169.54 E54.1 | 211.46,168.28 202.56,168.28 201.29,169.54 E55.1 200.03,169.54 199.39,168.91 166.37,168.91 165.74,168.28 153.03,168.28 | 224.16,168.28 225.43,169.54 E53.1 | 211.46,168.28 224.16,168.28 | 224.16,168.28 236.85,168.28 238.12,169.54 E52.1 | 127.64,168.28 118.75,168.28 117.47,169.54 E51.1 | 127.64,168.28 128.91,169.54 E50.1 | 127.64,168.28 140.34,168.28 141.6,169.54 E49.1 142.88,169.54 144.15,168.28 153.03,168.28 | v149.22,151.13 151.76,153.67 v154.31,153.67 | 153.03,168.28 154.31,169.54 E48.1
E30PIN8  (via drill 0.61)
  Top 0.254: v178.82,44.2 178.82,24.89 178.31,24.38 178.31,16.26 174.24,16.26 173.74,16.76 173.74,18.29 174.75,19.3 E30.8 | v220.98,44.2 220.98,52.32 E21.5 220.47,54.36 220.47,58.42 218.95,59.94 E21.11
  Bottom 0.254: v178.82,44.2 179.32,43.69 220.47,43.69 v220.98,44.2
E35-Y4
  Bottom 0.254: E35.11 117.35,41.66 118.36,42.67 135.64,42.67 136.65,41.66 E32.12
EMA0\  (via drill 0.61)
  Top 0.254: v40.64,17.78 43.18,20.32 43.18,37.59 J1.30 | v136.65,16.26 136.14,16.76 136.14,34.54 138.18,36.58 138.18,54.36 143.26,59.44 143.26,69.09 146.3,72.14 146.3,88.39 148.84,88.39 149.35,88.9 149.35,91.44 166.62,91.44 166.62,82.8 167.13,82.3 E27.11
  Bottom 0.254: R34.2 15.75,12.7 16.76,13.72 36.58,13.72 v40.64,17.78 119.38,17.78 120.9,16.26 v136.65,16.26
EMA1\  (via drill 0.61)
  Top 0.254: J1.28 45.72,37.59 43.69,35.56 v43.69,13.21 102.62,13.21 105.66,10.16 105.66,2.54 169.67,2.54 181.36,14.22 181.36,25.4 179.83,26.92 179.83,44.7 176.28,48.26 176.28,75.69 174.75,75.69 173.23,77.22 173.23,80.26 E27.9
  Bottom 0.254: v43.69,13.21 18.8,13.21 18.29,12.7 R35.2
EMA2\  (via drill 0.61)
  Top 0.254: v40.64,19.81 40.64,37.59 J1.32 | v124.46,17.27 124.46,4.06 141.22,4.06 148.34,11.18 148.34,11.68 152.4,15.75 152.4,61.47 154.43,63.5 154.43,85.34 159,85.34 162.05,82.3 E27.13
  Bottom 0.254: 39.62,18.8 v40.64,19.81 | 39.62,18.8 35.05,14.22 14.73,14.22 13.21,12.7 R36.2 | v124.46,17.27 122.94,18.8 39.62,18.8
EMODE\  (via drill 0.61)
  Top 0.254: 382.52,31.5 382.52,14.22 383.03,13.72 E3.6 | 382.52,31.5 383.03,32 E2.6 | 382.52,31.5 382.52,51.82 383.03,52.32 E1.6 | 249.94,31.5 250.44,32 250.44,57.4 252.48,59.44 252.48,79.76 251.97,80.26 E16.8 | v249.43,30.99 249.94,31.5 | 249.94,31.5 v252.98,28.45
  Bottom 0.254: v249.43,30.99 225.04,30.99 224.03,32 E22.6 | v252.98,28.45 254.51,26.92 275.84,26.92 276.35,27.43 378.46,27.43 383.03,32 E2.6
ENEXT  (via drill 0.61)
  Top 0.381: E45.13 229.24,145.41 231.14,147.32 231.14,151.76 R54.2 | ENEXT.1 285.12,105.41 285.12,115.57 ENEXT.2 283.85,118.11 282.57,119.38 282.57,130.18 v260.35,152.4
  Bottom 0.381: v260.35,152.4 231.78,152.4 R54.2
ENT0  (via drill 0.61)